# Altium PCB pcb.PcbDoc
Units mm, origin at the board's own origin, x right, y up, seen from the top; angles counter-clockwise.
Board outline 52.5 x 25 mm, 4 copper layers (Top Layer, Int1, Int2, Bottom Layer), stack 1.466 mm thick; 43 components, 32 nets, 169 pads, 164 vias.
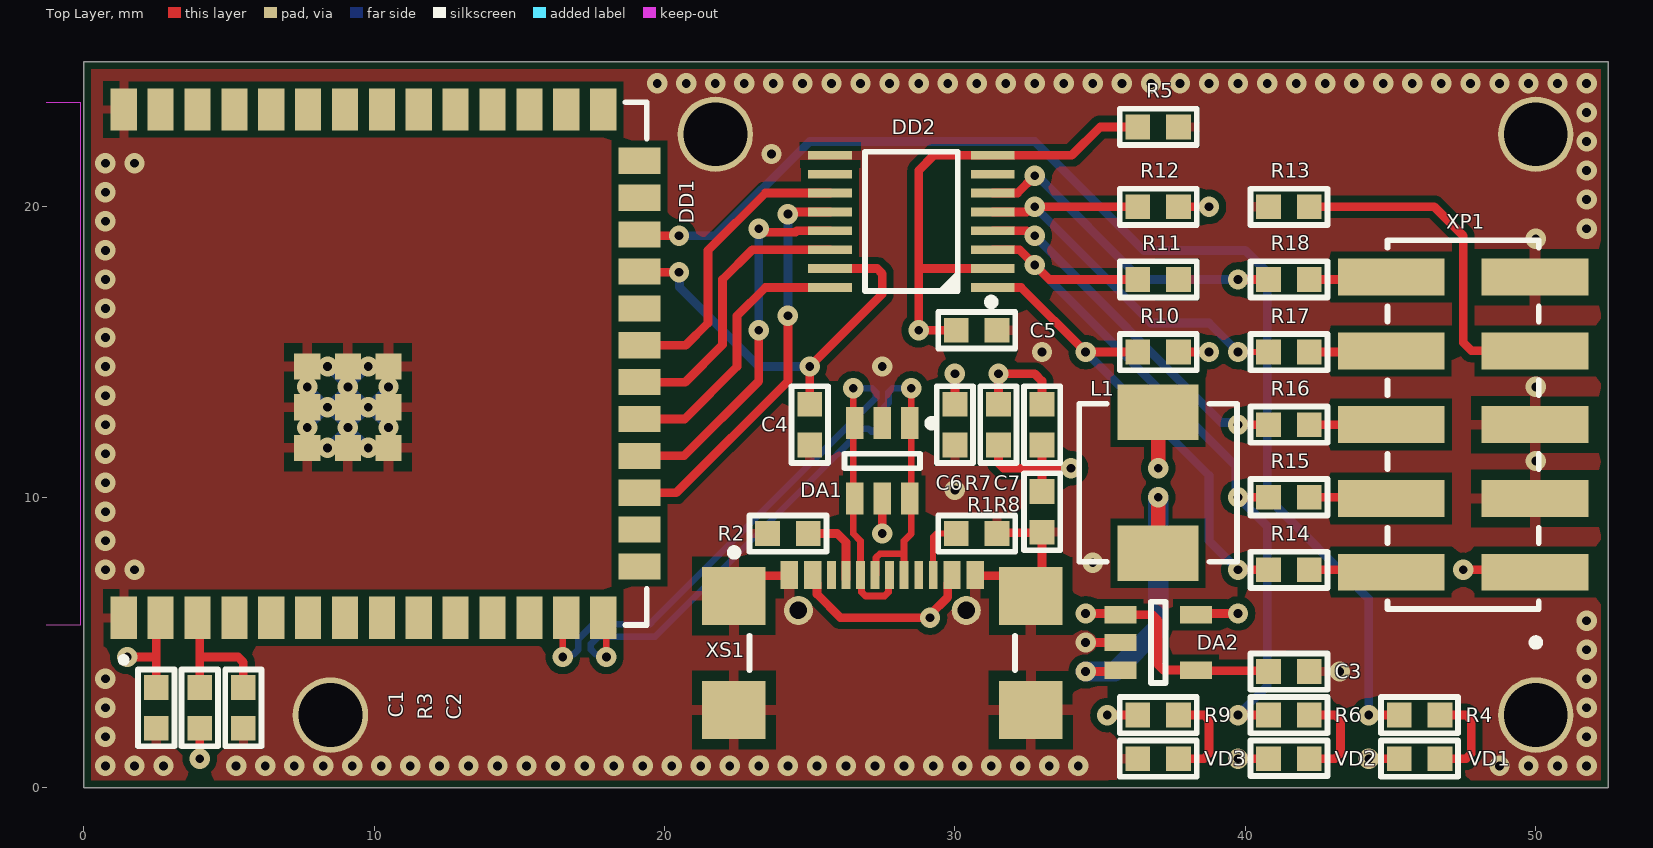
[diagram p0: Top Layer view]
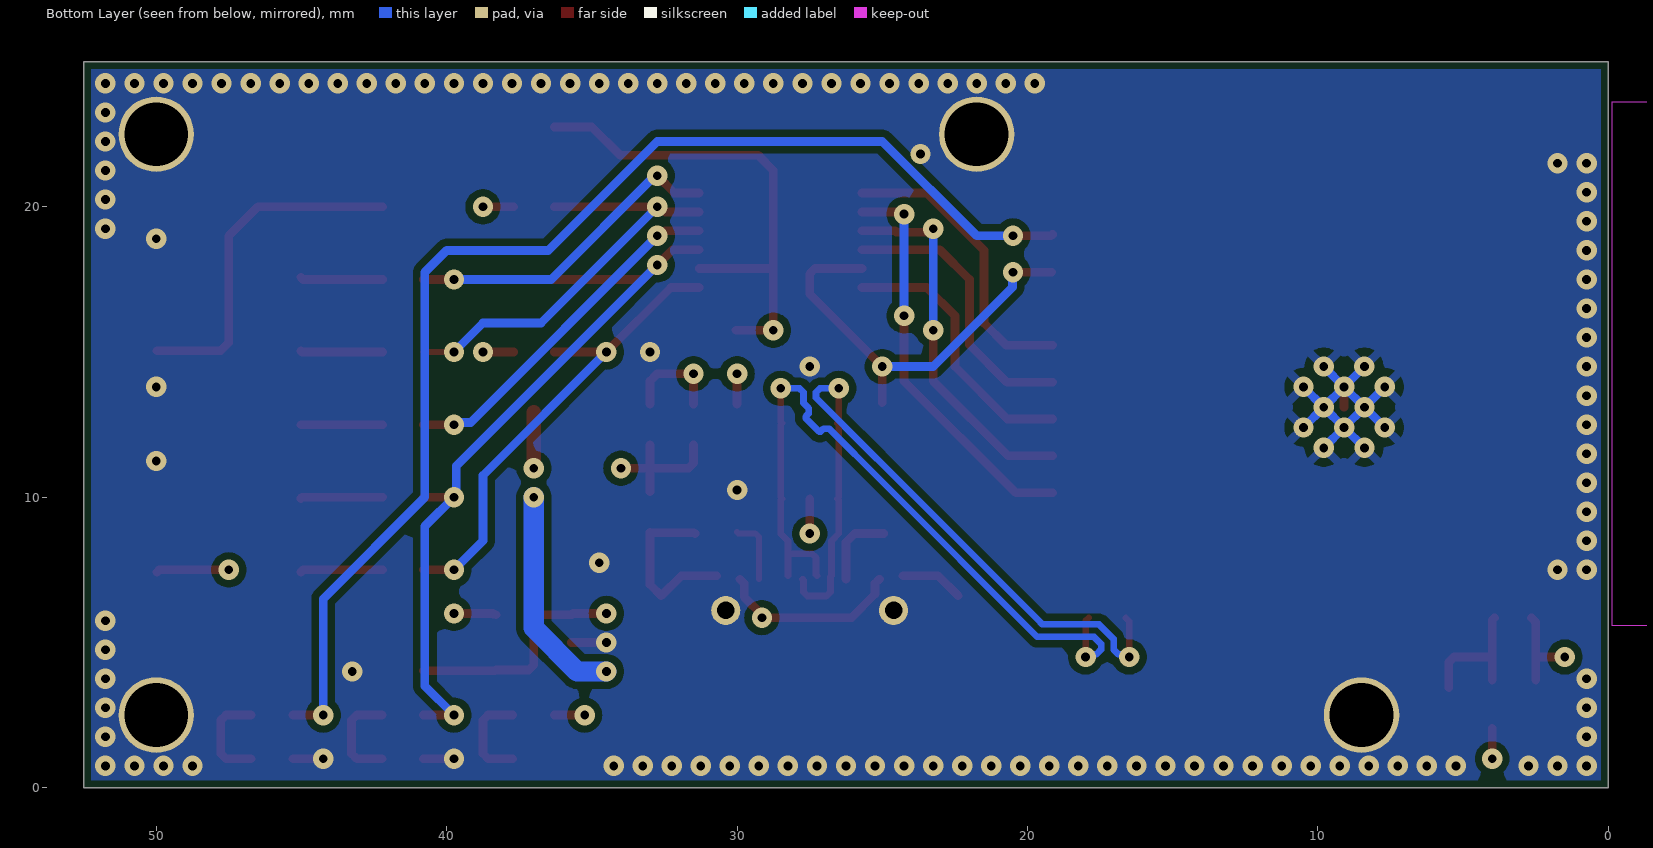
[diagram p1: Bottom Layer view, seen from below]
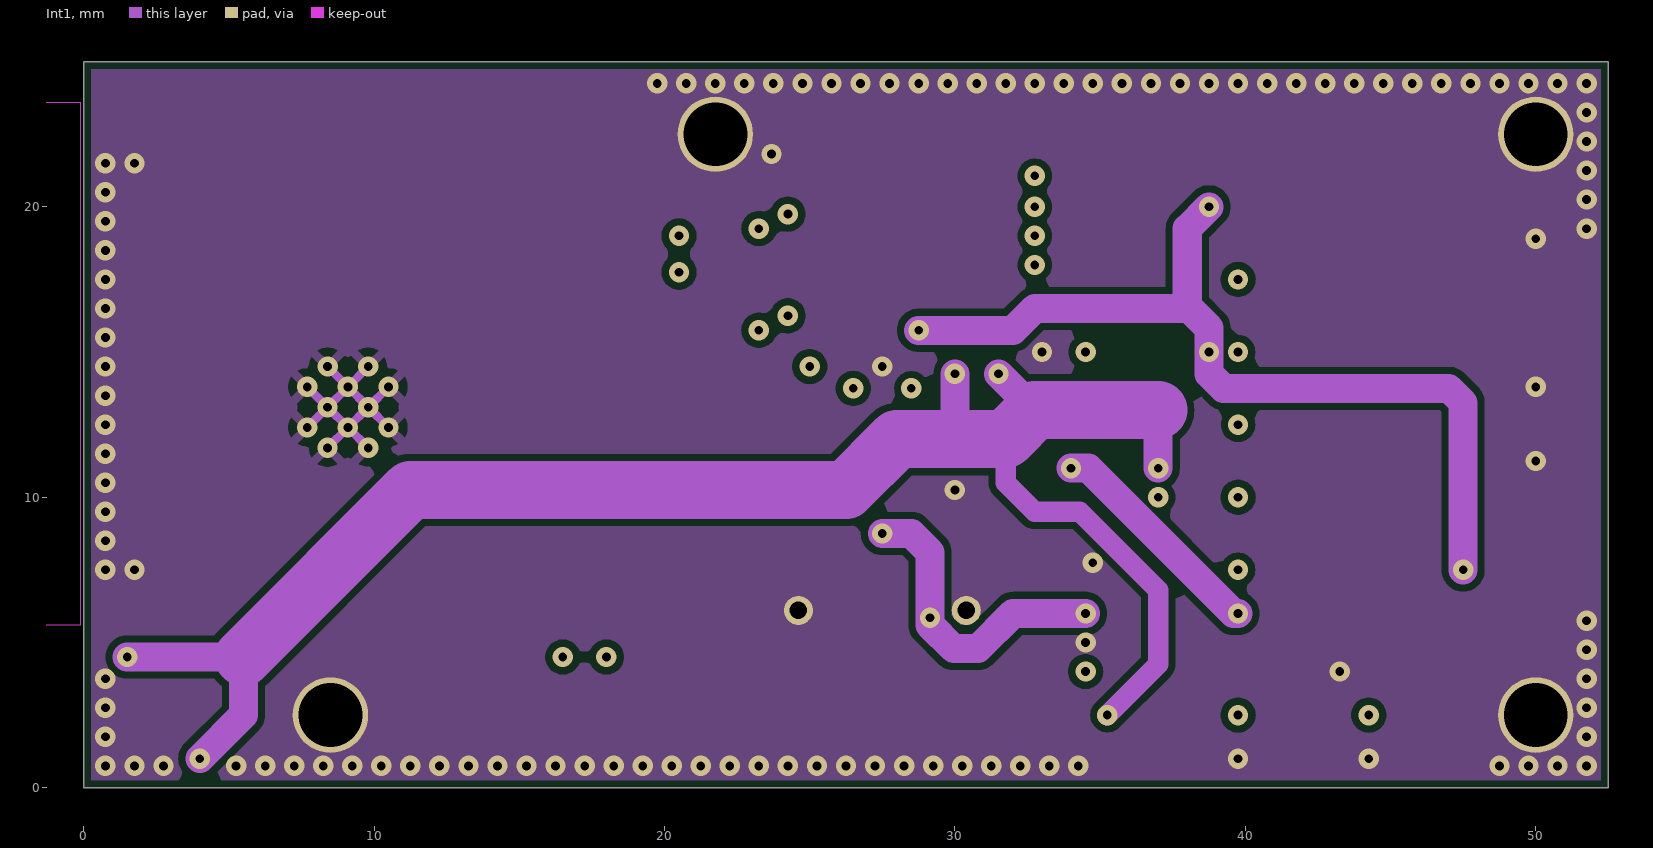
[diagram p2: Int1]
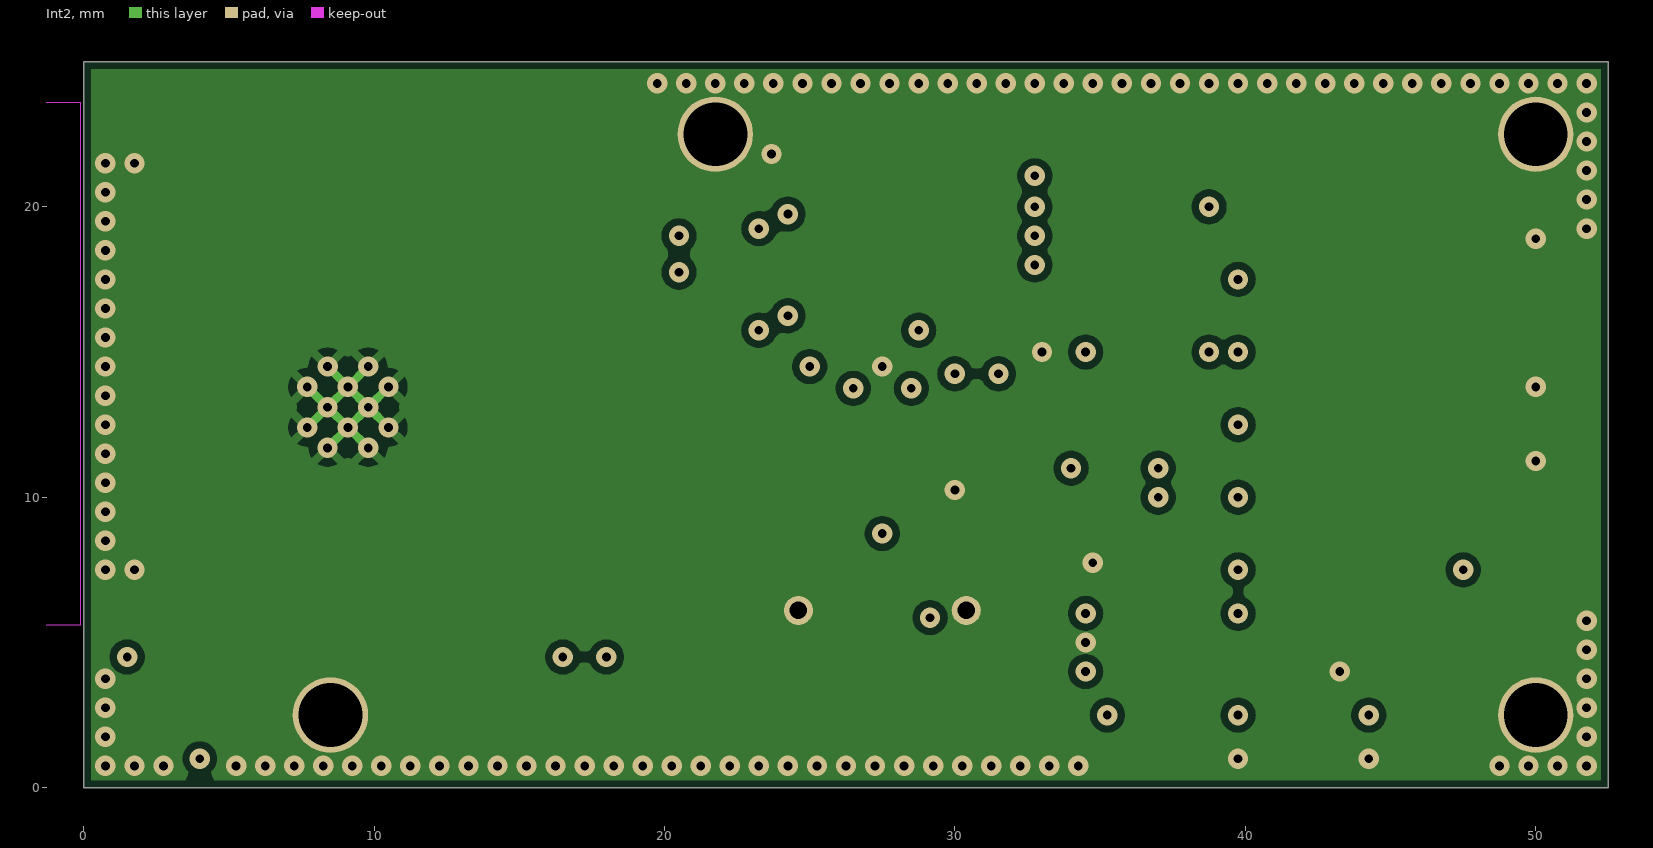
[diagram p3: Int2]

## Layer stack, top to bottom
Top Solder: solder mask 0.0254, SM-001, Dk 3.5
Top Layer: signal copper 0.018
Dielectric 2: prepreg 0.115, FR4, Dk 4.6
Int1: signal copper 0.018
Dielectric 3: core 1.164, FR4, Dk 4.6
Int2: signal copper 0.018
Dielectric 4: prepreg 0.115, FR4, Dk 4.6
Bottom Layer: signal copper 0.018
Bottom Solder: solder mask 0.0254, SM-001, Dk 3.5

## Board outline
0,0 52.5,0 52.5,25 0,25

## Design rules (kind name [scope] priority, off if disabled: settings)
AcuteAngle [All] p1: minimum=3.50000000000000E+0001 checktracksonly=FALSE
BoardOutlineClearance "BoardOutlineClearance 1" [All] p1: gap=0.25 ignorepadtopadclearanceinfootprint=FALSE except(0: Arc-SplitContinuation Track-SplitContinuation SMDPad-SplitContinuation THPad-SplitContinuation Via-SplitContinuation Fill-SplitContinuation Poly-SplitContinuation Region-SplitContinuation Text-SplitContinuation) // Milling
BoardOutlineClearance "BoardOutlineClearance 2" [All] p2: gap=0.4 ignorepadtopadclearanceinfootprint=FALSE except(0: Arc-SplitContinuation Track-SplitContinuation SMDPad-SplitContinuation THPad-SplitContinuation Via-SplitContinuation Fill-SplitContinuation Poly-SplitContinuation Region-SplitContinuation Text-SplitContinuation) // V-Cut
Clearance "Clearance 3 Oz" [All] p1 off: gap=0.35 ignorepadtopadclearanceinfootprint=FALSE except(0.25: Arc-Hole Track-Hole SMDPad-Hole THPad-Hole Via-Hole Fill-Hole Poly-Hole Region-Hole Text-Hole)
Clearance "Clearance 2 Oz" [All] p2 off: gap=0.3 ignorepadtopadclearanceinfootprint=FALSE except(0.25: Arc-Hole Track-Hole SMDPad-Hole THPad-Hole Via-Hole Fill-Hole Poly-Hole Region-Hole Text-Hole)
Clearance "Clearance-1 1 Oz" [All] p3 off: gap=0.2 ignorepadtopadclearanceinfootprint=FALSE except(0.3: Arc-Fill Arc-Poly Arc-Region Track-Fill Track-Poly Track-Region SMDPad-Fill SMDPad-Poly SMDPad-Region THPad-Fill THPad-Poly THPad-Region Via-Fill Via-Poly Via-Region Fill-Fill Fill-Poly Fill-Region Poly-Poly Poly-Region Region-Region) // Standart
Clearance "Clearance-2 1 Oz" [All] p4 off: gap=0.15 ignorepadtopadclearanceinfootprint=FALSE except(0.2: Arc-Fill Arc-Poly Track-Fill Track-Poly SMDPad-Fill SMDPad-Poly THPad-Fill THPad-Poly Via-Fill Via-Poly Fill-Fill Fill-Poly Poly-Poly; 0.25: Arc-Hole Track-Hole SMDPad-Hole THPad-Hole Via-Hole Fill-Hole Poly-Hole Region-Hole Text-Hole) // Advance
Clearance "Clearance-1 1/2 Oz" [All] p5: gap=0.125 ignorepadtopadclearanceinfootprint=FALSE except(0.2: Arc-Fill Track-Fill SMDPad-SMDPad SMDPad-Fill THPad-Fill Via-Fill Fill-Fill Poly-Region Poly-Text; 0.25: Arc-Poly Arc-Hole Track-Poly Track-Hole SMDPad-Poly SMDPad-Hole THPad-Poly THPad-Hole Via-Poly Via-Hole Fill-Poly Fill-Hole Poly-Poly Poly-Hole Region-Hole Text-Hole) // Standart
Clearance "Clearance-2 1/2 Oz" [All] p6: gap=0.1 ignorepadtopadclearanceinfootprint=FALSE except(0.15: Arc-Fill Track-Fill SMDPad-SMDPad SMDPad-Fill THPad-Fill Via-Fill Fill-Fill Poly-Region Poly-Text; 0.25: Arc-Poly Arc-Hole Track-Poly Track-Hole SMDPad-Poly SMDPad-Hole THPad-Poly THPad-Hole Via-Poly Via-Hole Fill-Poly Fill-Hole Poly-Poly Poly-Hole Region-Hole Text-Hole) // Advance
DiffPairsRouting DiffPair_DiffPairsRouting [InDifferentialPairClass('USB_D')] p1: maxlimit=0.2 minlimit=0.2 mostfreqgap=0.2 toplayer_minwidth=0.23 toplayer_maxwidth=0.23 toplayer_prefwidth=0.211 midlayer1_mingap=0 midlayer1_maxgap=0 midlayer1_prefgap=0 midlayer1_minwidth=0.045 midlayer1_maxwidth=0.045 midlayer1_prefwidth=0.045 midlayer2_mingap=0 midlayer2_maxgap=0 midlayer2_prefgap=0 midlayer2_minwidth=0.045 midlayer2_maxwidth=0.045 midlayer2_prefwidth=0.045 bottomlayer_minwidth=0.23 bottomlayer_maxwidth=0.23 bottomlayer_prefwidth=0.211 impedanceprofiledriven=TRUE impedanceprofileid={C67012E8-C93E-467A-9563-42220327DB25} impedanceprofilevalue=90.000000 maxuncoupledlength=3
DiffPairsRouting "DiffPairsRouting 1 Oz" [All] p2: maxlimit=0.254 minlimit=0.2 mostfreqgap=0.254 toplayer_minwidth=0.2 toplayer_maxwidth=0.381 toplayer_prefwidth=0.381 midlayer1_minwidth=0.2 midlayer1_maxwidth=0.381 midlayer1_prefwidth=0.381 midlayer2_minwidth=0.2 midlayer2_maxwidth=0.381 midlayer2_prefwidth=0.381 bottomlayer_minwidth=0.2 bottomlayer_maxwidth=0.381 bottomlayer_prefwidth=0.381 maxuncoupledlength=12.7
DiffPairsRouting "DiffPairsRouting 1/2 Oz" [All] p3: maxlimit=0.254 minlimit=0.1 mostfreqgap=0.254 toplayer_minwidth=0.1 toplayer_maxwidth=0.381 toplayer_prefwidth=0.381 midlayer1_minwidth=0.1 midlayer1_maxwidth=0.381 midlayer1_prefwidth=0.381 midlayer2_minwidth=0.1 midlayer2_maxwidth=0.381 midlayer2_prefwidth=0.381 bottomlayer_minwidth=0.1 bottomlayer_maxwidth=0.381 bottomlayer_prefwidth=0.381 maxuncoupledlength=12.7
HoleSize "Minimum HoleSize" [IsPad] p1 off: absolutevalues=TRUE maxlimit=5.9 minlimit=0.6 maxpercent=80.000 minpercent=20.000
HoleSize "Minimum HoleSize VIA 1" [IsVia] p2: absolutevalues=TRUE maxlimit=5.9 minlimit=0.3 maxpercent=80.000 minpercent=20.000 // Standart
HoleSize "Minimum HoleSize VIA 2" [IsVia] p3: absolutevalues=TRUE maxlimit=5.9 minlimit=0.2 maxpercent=80.000 minpercent=20.000 // Advance
HoleToHoleClearance Hole2HoleClearance [All] p1: gap=0.25 allowstackedmicrovias=FALSE
MatchedLengths DiffPair_MatchedLengths [InDifferentialPairClass('USB_D')] p1: tolerance=0.2 checknetsindiffpair=TRUE checkdiffpairvsdiffpair=FALSE checkxsignals=FALSE checkothers=FALSE
MinimumAnnularRing "Minimum AR VIA Standart" [IsVia] p1: minimumring=0.15
MinimumAnnularRing "Minimum AR PAD Standart" [IsPAD] p2: minimumring=0.2
MinimumAnnularRing "Minimum AR VIA Advance" [IsVia] p3: minimumring=0.1
MinimumAnnularRing "Minimum AR PAD Advance" [IsPAD] p4: minimumring=0.15
MinimumSolderMaskSliver "SolderMask Bridge Standart" [All] p1: minsoldermaskwidth=0.15 // All Masks
MinimumSolderMaskSliver "SolderMask Bridge Advance" [All] p2: minsoldermaskwidth=0.1 // Mask LDI
PlaneClearance "PlaneClearance 3 Oz" [All] p1: clearance=0.35
PlaneClearance "PlaneClearance 2 Oz" [All] p2: clearance=0.3
PlaneClearance "PlaneClearance 1 Oz" [All] p3: clearance=0.2
PlaneClearance "PlaneClearance-1 1/2 Oz" [All] p4: clearance=0.2 // Standart
PlaneClearance "PlaneClearance-2 1/2 Oz" [All] p5: clearance=0.15 // Advance
PlaneConnect "TermalConnect 3 Oz" [All] p1: planeconnectstyle=Relief reliefexpansion=0.2 reliefentries=4 reliefconductorwidth=0.35 reliefairgap=0.35 // Standart
PlaneConnect "TermalConnect 2 Oz" [All] p2: planeconnectstyle=Relief reliefexpansion=0.2 reliefentries=4 reliefconductorwidth=0.3 reliefairgap=0.3 // Standart
PlaneConnect "TermalConnect-1 1 Oz" [All] p3: planeconnectstyle=Relief reliefexpansion=0.2 reliefentries=4 reliefconductorwidth=0.2 reliefairgap=0.2 // Standart
PlaneConnect "TermalConnect-2 1 Oz" [All] p4: pad.planeconnectstyle=Relief pad.reliefexpansion=0.15 pad.reliefentries=4 pad.reliefconductorwidth=0.2 pad.reliefairgap=0.2 via.planeconnectstyle=Direct via.reliefexpansion=0.15 via.reliefentries=4 via.reliefconductorwidth=0.15 via.reliefairgap=0.15 // Advance
PlaneConnect "TermalConnect-1 1/2 Oz" [All] p5: planeconnectstyle=Relief reliefexpansion=0.2 reliefentries=4 reliefconductorwidth=0.2 reliefairgap=0.2 // Standart
PlaneConnect "TermalConnect-2 1/2 Oz" [All] p6: pad.planeconnectstyle=Relief pad.reliefexpansion=0.15 pad.reliefentries=4 pad.reliefconductorwidth=0.15 pad.reliefairgap=0.15 via.planeconnectstyle=Direct via.reliefexpansion=0.15 via.reliefentries=4 via.reliefconductorwidth=0.15 via.reliefairgap=0.15 // Advance
PolygonConnect "PolygonConnect 3 Oz" [All] p1: thpad.connectstyle=Relief thpad.reliefconductorwidth=0.35 thpad.reliefentries=4 thpad.polygonreliefangle="90 Angle" thpad.airgapwidth=0.35 smdpad.connectstyle=Relief smdpad.reliefconductorwidth=0.35 smdpad.reliefentries=4 smdpad.polygonreliefangle="90 Angle" smdpad.airgapwidth=0.35 via.connectstyle=Direct via.reliefconductorwidth=0.254 via.reliefentries=4 via.polygonreliefangle="90 Angle" via.airgapwidth=0.254
PolygonConnect "PolygonConnect 2 Oz" [All] p2: thpad.connectstyle=Relief thpad.reliefconductorwidth=0.3 thpad.reliefentries=4 thpad.polygonreliefangle="90 Angle" thpad.airgapwidth=0.3 smdpad.connectstyle=Relief smdpad.reliefconductorwidth=0.3 smdpad.reliefentries=4 smdpad.polygonreliefangle="90 Angle" smdpad.airgapwidth=0.3 via.connectstyle=Direct via.reliefconductorwidth=0.254 via.reliefentries=4 via.polygonreliefangle="90 Angle" via.airgapwidth=0.254
PolygonConnect "PolygonConnect-1 1 Oz" [All] p3: thpad.connectstyle=Relief thpad.reliefconductorwidth=0.2 thpad.reliefentries=4 thpad.polygonreliefangle="90 Angle" thpad.airgapwidth=0.2 smdpad.connectstyle=Relief smdpad.reliefconductorwidth=0.2 smdpad.reliefentries=4 smdpad.polygonreliefangle="90 Angle" smdpad.airgapwidth=0.2 via.connectstyle=Direct via.reliefconductorwidth=0.254 via.reliefentries=4 via.polygonreliefangle="90 Angle" via.airgapwidth=0.254 // Standart
PolygonConnect "PolygonConnect-2 1 Oz" [All] p4: thpad.connectstyle=Relief thpad.reliefconductorwidth=0.15 thpad.reliefentries=4 thpad.polygonreliefangle="90 Angle" thpad.airgapwidth=0.15 smdpad.connectstyle=Relief smdpad.reliefconductorwidth=0.15 smdpad.reliefentries=4 smdpad.polygonreliefangle="90 Angle" smdpad.airgapwidth=0.15 via.connectstyle=Direct via.reliefconductorwidth=0.254 via.reliefentries=4 via.polygonreliefangle="90 Angle" via.airgapwidth=0.254 // Advance
PolygonConnect "PolygonConnect-1 1/2 Oz" [All] p5: thpad.connectstyle=Relief thpad.reliefconductorwidth=0.15 thpad.reliefentries=4 thpad.polygonreliefangle="90 Angle" thpad.airgapwidth=0.2 smdpad.connectstyle=Relief smdpad.reliefconductorwidth=0.2 smdpad.reliefentries=4 smdpad.polygonreliefangle="90 Angle" smdpad.airgapwidth=0.2 via.connectstyle=Direct via.reliefconductorwidth=0.254 via.reliefentries=4 via.polygonreliefangle="90 Angle" via.airgapwidth=0.254 // Standart
PolygonConnect "PolygonConnect-2 1/2 Oz" [All] p6: thpad.connectstyle=Relief thpad.reliefconductorwidth=0.125 thpad.reliefentries=4 thpad.polygonreliefangle="90 Angle" thpad.airgapwidth=0.15 smdpad.connectstyle=Relief smdpad.reliefconductorwidth=0.125 smdpad.reliefentries=4 smdpad.polygonreliefangle="90 Angle" smdpad.airgapwidth=0.15 via.connectstyle=Direct via.reliefconductorwidth=0.254 via.reliefentries=4 via.polygonreliefangle="90 Angle" via.airgapwidth=0.254 // Advance
RoutingCorners [All] p1 off: cornerstyle=45-Degree minsetback=2.54 maxsetback=2.54
RoutingVias [All] p1: holewidth=0.2 width=0.4 viastyle="Through Hole" minholewidth=0.2 minwidth=0.4 maxholewidth=5.9 maxwidth=6.4
SilkToSilkClearance Silk2SilkClearance [All] p1 off: silktosilkclearance=0.15
SilkToSolderMaskClearance Silk2SolderMaskClearance [IsPad] p1 off: minsilkscreentomaskgap=0.15 clearancetoexposedcopper=TRUE
SolderMaskExpansion SolderMaskExpansion-1 [All] p1: expansion=0.05 istentingtop=FALSE // Standart
SolderMaskExpansion "SolderMaskExpansion LDI" [All] p2: expansion=0.025 istentingtop=FALSE // Advance
UnRoutedNet [All] p1: checkbadconnections=TRUE
Width "Width 3 Oz" [All] p1 off: maxlimit=10 minlimit=0.35 preferedwidth=0.4 checkconnectedcopper=TRUE
Width "Width 2 Oz" [All] p2 off: maxlimit=10 minlimit=0.3 preferedwidth=0.35 minimp=50.000000 maximp=50.000000 favimp=50.000000 checkconnectedcopper=TRUE
Width "Width 1 Oz" [All] p3: maxlimit=10 minlimit=0.15 preferedwidth=0.2 checkconnectedcopper=TRUE
Width "Width 1/2 Oz" [All] p4: maxlimit=10 minlimit=0.1 preferedwidth=0.125 checkconnectedcopper=TRUE
20 further rules are at their usual default settings.

## Classes and differential pairs
differential pair class USB_D: D
component class schematic: C1 C2 C3 C4 C5 C6 C7 DA1 DA2 DD1 DD2 L1 R1 R2 R3 R4 R5 R6 R7 R8 R9 R10 R11 R12 R13 R14 R15 R16 R17 R18 VD1 VD2 VD3 XP1 XS1
differential pair D: +NetDA1_1 -NetDA1_3

## Components (designator, comment, footprint, x,y, rotation, side; value= is the part's Value field where it differs from the comment)
C1 "04023J0R9BBWTR" "CAP: 0603" 2.5,2.75 r90 top
C2 "04023J0R9BBWTR" "CAP: 0603" 5.5,2.75 r90 top
C3 "04023J0R9BBWTR" "CAP: 0603" 41.5,4 r180 top
C4 "04023J0R9BBWTR" "CAP: 0603" 25,12.5 r90 top
C5 "04023J0R9BBWTR" "CAP: 0603" 30.75,15.75 r180 top
C6 "04023J0R9BBWTR" "CAP: 0603" 30,12.5 r90 top
C7 "04023J0R9BBWTR" "CAP: 0603" 33,12.5 r90 top
DA1 "SRV05-4.TCT" SOT23-6 27.5,11.25 r270 top
DA2 "TLV62569DBVR" SOT23-5 37,5 r0 top
DD1 "ESP32-WROOM-32U (16MB)" ? 6.64,14.6 r90 top
DD2 "TXB0106PWR" 16-SSOP 28.5,19.5 r180 top
L1 "IHLP2020CZER2R2M01" FP-IHLP-2020CZ-FP_1_905x2-MFG 37,10.5 r90 top
R1 "RC0402FR-074K7L" "RES: 0603" 30.75,8.75 r0 top
R2 "RC0402FR-074K7L" "RES: 0603" 24.25,8.75 r180 top
R3 "RC0402FR-074K7L" "RES: 0603" 4,2.75 r270 top
R4 "RC0402FR-074K7L" "RES: 0603" 46,2.5 r180 top
R5 "RC0402FR-074K7L" "RES: 0603" 37,22.75 r0 top
R6 "RC0402FR-074K7L" "RES: 0603" 41.5,2.5 r180 top
R7 "RC0402FR-074K7L" "RES: 0603" 31.5,12.5 r270 top
R8 "RC0402FR-074K7L" "RES: 0603" 33,9.5 r270 top
R9 "RC0402FR-074K7L" "RES: 0603" 37,2.5 r180 top
R10 "RC0402FR-074K7L" "RES: 0603" 37,15 r180 top
R11 "RC0402FR-074K7L" "RES: 0603" 37,17.5 r180 top
R12 "RC0402FR-074K7L" "RES: 0603" 37,20 r180 top
R13 "RC0402FR-074K7L" "RES: 0603" 41.5,20 r180 top
R14 "RC0402FR-074K7L" "RES: 0603" 41.5,7.5 r180 top
R15 "RC0402FR-074K7L" "RES: 0603" 41.5,10 r180 top
R16 "RC0402FR-074K7L" "RES: 0603" 41.5,12.5 r180 top
R17 "RC0402FR-074K7L" "RES: 0603" 41.5,15 r180 top
R18 "RC0402FR-074K7L" "RES: 0603" 41.5,17.5 r180 top
VD1 "LED, Green, *, *, *, -55...+150°C" "LED: 0603G" 46,1 r180 top
VD2 "LED, Green, *, *, *, -55...+150°C" "LED: 0603B" 41.5,1 r180 top
VD3 "LED, Green, *, *, *, -55...+150°C" "LED: 0603R" 37,1 r180 top
XP1 "TST" FP-TSM-105-01-F-DV-MFG 47.5,12.5 r270 top
XS1 "12401610E4#2A" FP-USB4110-GF-A-MFG 27.5,3.5 r0 top
ZBOAS267391354 "Comment" "BOASVIEWside:Вид платы сверху:5:0:0:0" 45,2297.5 r0 top
ZBOAS267393814 "Comment" "BOASVIEWbasic:Ocновной вид платы:5:1:0:0" 45,2360 r0 top (schematic designator fewf)
ZBOAS519188843 "Comment" "BOASVIEWrazrez:Разрез платы:50:0:0:0" 108.954,2233.734 r0 top
ZBOAS1201875177 "Слой 4" "BOASVIEWlayer:Bottom Layer:10:-1:32:5:auto" 19.865,2011.6 r0 top (schematic designator fewf)
ZBOAS1448498736 "Comment" "BOASVIEWdrill:Таблица отверстий:0:0:0:0" 345,2485 r0 top
ZBOAS3540491712 "Слой 1" "BOASVIEWlayer:Top Layer:10:1:1:2:auto" 613.865,2181.6 r0 top (schematic designator fewf)
ZBOAS5878991712 "Слой 2" BOASVIEWlayer:Int1:10:1:2:3:auto 1207.865,2181.6 r0 top (schematic designator fewf)
ZBOAS8217591712 "Слой 3" BOASVIEWlayer:Int2:10:-1:3:4:auto 1801.865,2431.6 r0 top (schematic designator fewf)

## Footprints (in the part's own frame and the unit in brackets; to place one, negate y for a bottom-side part, rotate by r counter-clockwise, add the part's x,y. Pads: shape width x height; smd on the part's side, far side on the other; paste and mask are expansions set on the pad)
16-SSOP [mm] "pitch 0.635 mm"
  rect 1.5x0.3 smd: 1(-2.8,2.275) 2(-2.8,1.625) 3(-2.8,0.975) 4(-2.8,0.325) 5(-2.8,-0.325) 6(-2.8,-0.975) 7(-2.8,-1.625) 8(-2.8,-2.275) 9(2.8,-2.275) 10(2.8,-1.625) 11(2.8,-0.975) 12(2.8,-0.325) 13(2.8,0.325) 14(2.8,0.975) 15(2.8,1.625) 16(2.8,2.275)
  rect 0.5x0.5 on Mech1: ""(-2.6,2)
  silkscreen extent -2.88,-2.4 1.6,2.9, body extent -3.13,-2.5 3.13,2.5, height 1.73
"BOASVIEWbasic:Ocновной вид платы:5:1:0:0" [mm]
"BOASVIEWdrill:Таблица отверстий:0:0:0:0" [mm]
"BOASVIEWlayer:Bottom Layer:10:-1:32:5:auto" [mm]
BOASVIEWlayer:Int1:10:1:2:3:auto [mm]
BOASVIEWlayer:Int2:10:-1:3:4:auto [mm]
"BOASVIEWlayer:Top Layer:10:1:1:2:auto" [mm]
"BOASVIEWrazrez:Разрез платы:50:0:0:0" [mm]
"BOASVIEWside:Вид платы сверху:5:0:0:0" [mm]
"CAP: 0603" [mm]
  rect 0.85x0.85 smd: 1(-0.7,0) 2(0.7,0)
  silkscreen extent -1.33,-0.63 1.33,0.63, body extent -0.8,-0.4 0.8,0.4, height 0.45
FP-IHLP-2020CZ-FP_1_905x2-MFG [mm]
  rect 1.905x2.79 smd paste+0 mask+0: 1(-2.425,0) 2(2.425,0)
  silkscreen extent -2.72,-2.72 2.72,2.72, body extent -3.48,-2.82 3.48,2.82, height 0.25
FP-TSM-105-01-F-DV-MFG [mm]
  rect 1.27x3.68 smd paste+0 mask+0: 1(5.08,2.475) 2(5.08,-2.475) 3(2.54,2.475) 4(2.54,-2.475) 5(0,2.475) 6(0,-2.475) 7(-2.54,2.475) 8(-2.54,-2.475) 9(-5.08,2.475) 10(-5.08,-2.475)
  silkscreen extent -6.35,-2.61 7.62,2.63, body extent -6.45,-4.42 6.45,4.42, height 0.25
FP-USB4110-GF-A-MFG [mm]
  rect 0.3x0.95 smd paste+0 mask+0: A8(1.25,3.825) B8(-1.75,3.825) CC1(-1.25,3.825) CC2(1.75,3.825) D+(-0.25,3.825) D+(0.75,3.825) D-(-0.75,3.825) D-(0.25,3.825)
  rect 0.6x0.95 smd paste+0 mask+0: GND(-3.2,3.825) GND(3.2,3.825) VBUS(-2.4,3.825) VBUS(2.4,3.825)
  rect 2.18x2 smd paste+0 mask+0: SHLD(-5.11,-0.825) SHLD(-5.11,3.105) SHLD(5.11,-0.825) SHLD(5.11,3.105)
  round 1 hole 0.6: ""(-2.89,2.605) ""(2.89,2.605)
  silkscreen extent -5.22,0.55 4.57,4.72, body extent -6.3,-3.92 6.3,4.36, height 0.25
"LED: 0603B" [mm]
  rect 0.85x0.85 smd: 1(-0.7,0) 2(0.7,0)
  silkscreen extent -1.33,-0.63 1.33,0.6, body extent -0.8,-0.4 0.8,0.4, height 0.6
"LED: 0603G" [mm]
  rect 0.85x0.85 smd: 1(-0.7,0) 2(0.7,0)
  silkscreen extent -1.33,-0.63 1.33,0.63, body extent -0.8,-0.4 0.8,0.4, height 0.6
"LED: 0603R" [mm]
  rect 0.85x0.85 smd: 1(-0.7,0) 2(0.7,0)
  silkscreen extent -1.33,-0.63 1.33,0.63, body extent -0.8,-0.4 0.8,0.4, height 0.6
"RES: 0603" [mm]
  rect 0.85x0.85 smd: 1(-0.7,0) 2(0.7,0)
  silkscreen extent -1.33,-0.63 1.33,0.63, body extent -0.8,-0.4 0.8,0.4, height 0.45
SOT23-5 [mm] "pitch 0.95 mm"
  rect 1.1x0.6 smd: 1(-1.3,0.95) 2(-1.3,0) 3(-1.3,-0.95) 4(1.3,-0.95) 5(1.3,0.95)
  round 0.5 on Mech1: ""(-1.1,1.1)
  silkscreen extent -0.25,-1.4 0.25,1.4, body extent -1.5,-1.5 1.5,1.5, height 1.3
SOT23-6 [mm] "pitch 0.95 mm"
  rect 1.1x0.6 smd: 1(-1.3,0.95) 2(-1.3,0) 3(-1.3,-0.95) 4(1.3,-0.95) 5(1.3,0) 6(1.3,0.95)
  round 0.5 on Mech1: ""(-1,1.1)
  silkscreen extent -1.42,-1.3 0.25,1.83, body extent -1.4,-1.45 1.4,1.45, height 1.45
? [mm]
  rect 1.45x0.9 smd: 1(-8.75,5.26) 2(-8.75,3.99) 3(-8.75,2.72) 4(-8.75,1.45) 5(-8.75,0.18) 6(-8.75,-1.09) 7(-8.75,-2.36) 8(-8.75,-3.63) 9(-8.75,-4.9) 10(-8.75,-6.17) 11(-8.75,-7.44) 12(-8.75,-8.71) 13(-8.75,-9.98) 14(-8.75,-11.25) 27(8.75,-11.25) 28(8.75,-9.98) 29(8.75,-8.71) 30(8.75,-7.44) 31(8.75,-6.17) 32(8.75,-4.9) 33(8.75,-3.63) 34(8.75,-2.36) 35(8.75,-1.09) 36(8.75,0.18) 37(8.75,1.45) 38(8.75,2.72) 39(8.75,3.99) 40(8.75,5.26)
  rect 0.9x1.45 smd: 15(-6.985,-12.5) 16(-5.715,-12.5) 17(-4.445,-12.5) 18(-3.175,-12.5) 19(-1.905,-12.5) 20(-0.635,-12.5) 21(0.635,-12.5) 22(1.905,-12.5) 23(3.175,-12.5) 24(4.445,-12.5) 25(5.715,-12.5) 26(6.985,-12.5)
  rect 0.9x0.9 smd: 41(-2.9,-2.46) 41(-2.9,-1.06) 41(-2.9,-3.86) 41(-1.5,-1.06) 41(-1.5,-3.86) 41(-1.5,-2.46) 41(-0.1,-1.06) 41(-0.1,-2.46) 41(-0.1,-3.86)
  Keep-Out Layer region: 9,6.75 -9,6.75 -9,12.75 9,12.75
  Keep-Out Layer region: 9,6.75 -9,6.75 -9,12.75 9,12.75
  silkscreen extent -10.3,-12.75 9,5.36, body extent -9,-12.75 9,12.75, height 3.25

## Part data
C1 C2 C3 C4 C5 C6 C7: library part C, Manufacturer="AVX Interconnect / Elco", Part Number=04023J0R9BBWTR
DA1: "RailClamp(R) Low Capacitance TVS Diode Array, 5 pF, 17.5 VC, -55 to 125 degC, 6-Pin SOT23, RoHS, Tape and Reel", Capacitance Value=5pF, Clamping Voltage=17.5V, Clamping Voltage (Max)=12.5V, Leakage Current=5uA, Manufacturer=Semtech, Operating Temp Range=-55Cto125C, Operating Temperature Classification=Military, Operating Temperature Max Deg. C=125C, Operating Temperature Min Deg. C=-55C, Package / Case=SOT-23, Package Description="6-Pin Small Outline Transistor, Body 2.9 x 1.6 mm, Pitch 0.95 mm", Package Reference=SOT23-6, Peak Pulse Current=12A, Peak Pulse Power Dissipation=300W, Reverse Breakdown Voltage=6V, Reverse Stand-off Voltage=5V, Test Current (It)=1mA, Configuration=Quad, Datasheet URL=https://datasheet.ciiva.com/8029/srv05-4-8029973.pdf, Datasheet Version=Jan-08, Direction Type=Uni-Directional, Leakage Current (Max)=5uA, Manufacturer URL=http://www.semtech.com/, Mounting=SurfaceMount, Mounting Style=SurfaceMount, Number of Elements=1, Packaging=TapeandReel, Pin Count=6, Polarity=Uni-Directional, Product Depth (mm)=1.6mm, Product Height (mm)=1.15mm, Product Length (mm)=2.9mm, Rad Hardened=No, Suppressor Type=DiodeArrays, Working Voltage=5V, Working Voltage (Max)=5V
DA2: library part STU_SW, "IC REG BUCK ADJ 2A SOT23-5", Case/Package=SOT-23-5, Max Input Voltage=5.5V, Max Operating Temperature=125°C, Min Input Voltage=2.5V, Min Operating Temperature=-40°C, Min Output Voltage=600mV, Output Current=2A, Switching Frequency=1.5MHz, Max Output Voltage=5.5V, Mount="Surface Mount", Output Configuration=Positive, Output Type=Adjustable, Packaging="Cut Tape", RoHS Compliant=Yes, Synchronous Rectifier=Yes
DD1: library part ESP32-S3, "RX TXRX MODULE WIFI U.FL SMD", Case/Package=SMD/SMT, Frequency=2.5GHz, Max Operating Temperature=85°C, Min Operating Temperature=-40°C, Data Rate=150Mbps, Interface=I2C, Memory Size=536KB, Mount="Surface Mount", Packaging="Tape and Reel", Sensitivity=-98dBm
DD2: Ambient Temperature Range High=85°C, Case/Package=TSSOP, High Level Output Current=-20µA, Low Level Output Current=20µA, Manufacturer Lifecycle Status=ACTIVE, Max Junction Temperature (Tj)=150°C, Max Supply Voltage=5.5V, Min Operating Temperature=-40°C, Min Supply Voltage=1.2V, Quiescent Current=3.5µA, Contact Plating=Gold, Data Rate=100Mbps, Height=1.2mm, Lead Free="Lead Free", Length=5mm, Lifecycle Status=Production, Logic Function=Translator, Max Operating Temperature=85°C, Min Supply Voltage (DC)=1.2V, Mount="Surface Mount", NexarPartId=9437508, Number of Bits=6, Number of Channels=6, Number of Circuits=1, Number of Inputs=6, Number of Outputs=6, Number of Pins=16, Number of Transceivers=6, Output Current=20µA, Packaging="Cut Tape (CT)", Propagation Delay=4ns, Radiation Hardening=No, REACH SVHC="No SVHC", RoHS=Compliant, Schedule B="8542390000, 8542390000", Termination=SMD/SMT, Thickness=1mm, Turn-On Delay Time=9.5ns, Weight=61.887009mg, Width=4.4mm
L1: library part L, "Fixed Inductors Commercial High Saturation Series 2.2uH 5.8A 29.2mΩ 20%", Case/Package=2020, Current Rating=5.8A, DC Resistance (DCR)=29.2mR, Inductance=2.2uH, Inductance Tolerance=20%, Max DC Current=10A, Max Operating Temperature=125°C, Min Operating Temperature=-55°C, Package Quantity=2000, Self Resonant Frequency=39MHz, Test Frequency=100kHz, Contact Plating=Tin, Core Material=Metal, Depth=5.43mm, Height=3mm, Height - Seated (Max)=0.118inch, Lead Free="Lead Free", Length=5.74mm, Military Standard=Not, Mount="Surface Mount", Packaging="Tape and Reel", Radiation Hardening=No, RMS Current (Irms)=5.8A, Saturation Current=10A, Shielding=Shielded, Termination=SMD/SMT, Tolerance=20%, Weight=0.007055oz, Width=0.204inch
R1 R2 R3 R4 R5 R6 R7 R8 R9 R10 R11 R12 R13 R14 R15 R16 R17 R18: library part R, Manufacturer="Yageo / Phycomp", Part Number=RC0402FR-074K7L
VD1: library part LED, "FYLS-0603UGC", Color=GREEN, ColorParameter=Green, Temperature=-55...+150°C, TypeDiode=LED, ValueManufacturerPartNumber="LED, Green, *, *, *, -55...+150°C"
VD2: library part LED, "FYLS-0603UBC", Color=GREEN, ColorParameter=Green, Temperature=-55...+150°C, TypeDiode=LED, ValueManufacturerPartNumber="LED, Green, *, *, *, -55...+150°C"
VD3: library part LED, Color=GREEN, ColorParameter=Green, Temperature=-55...+150°C, TypeDiode=LED, ValueManufacturerPartNumber="LED, Green, *, *, *, -55...+150°C"
XP1: library part TST-10
XS1: library part USB-C, "CONN RCP USB3.1 TYPEC 24P SMD RA", Connector Type=USB, Gender=Receptacle, Mount="Surface Mount", Number of Contacts=24, Number of Pins=24, Packaging="Cut Tape"

## Free pads (board coordinates)
  round 2.6 hole 2.2 mask+0.3: 1(8.5,2.5) 1(21.75,22.5) 1(50,2.5) 1(50,22.5)

## Via types
v1: diameter 0.7, hole 0.3, Top Layer to Bottom Layer, tented both sides, 163 vias
v2: diameter 0.7/0.7/0.7/0.7 (per signal layer), hole 0.3, Top Layer to Bottom Layer, tented both sides, 1 vias

## Nets (pads, with @x,y where several pads share a name; then routed paths per layer and width w, separated by ;. In a path a pad name is that pad's centre, name@x,y a point inside that pad or via, vN(x,y) a via of type N, cw(c..) or ccw(c..) an arc to the next point about the centre after c; other vN are vias at no path point)
GND: C1.1 C2.1 C3.1 C4.1 C5.1 C6.1 DA1.2 DA2.2 DD1.1 DD1.40 DD1.41 DD2.9 pad.1 R1.2 R2.2 R5.2 R8.2 R11.1 R13.2 VD1.2 VD2.2 VD3.2 XP1.3 XP1.5 XP1.9 XS1. XS1.GND XS1.SHLD | length 48
  Top Layer w0.3: DD1.41@9.1,13.1 v1(9.1,13.8) ; XS1.SHLD@22.39,6.605 23.085,7.3 XS1.GND@24.3,7.3 ; XS1.GND@30.7,7.3 31.915,7.3 32.61,6.605 33,6.995 R8.2 32.975,8.775 31.475,8.775 R1.2 ; v1(34.5,5) DA2.2 ; v1(39.75,1) VD2.2 ; v1(44.25,1) VD1.2
  Int1 w0.3: v1(7.7,12.4) v1(8.4,13.1) ; v1(7.7,13.8) v1(8.4,13.1) ; v1(8.4,11.7) v1(9.1,12.4) ; v1(8.4,14.5) v1(9.1,13.8) ; v1(9.8,11.7) v1(9.1,12.4) ; v1(9.8,14.5) v1(9.1,13.8) ; v1(10.5,12.4) v1(9.8,13.1) ; v1(10.5,13.8) v1(9.8,13.1) ; v1(8.4,13.1) v1(9.1,12.4) ; v1(8.4,13.1) v1(9.1,13.8) ; v1(9.1,12.4) v1(9.8,13.1) ; v1(9.1,13.8) v1(9.8,13.1)
  Int2 w0.3: v1(7.7,12.4) v1(8.4,13.1) ; v1(7.7,13.8) v1(8.4,13.1) ; v1(8.4,11.7) v1(9.1,12.4) ; v1(8.4,14.5) v1(9.1,13.8) ; v1(9.8,11.7) v1(9.1,12.4) ; v1(9.8,14.5) v1(9.1,13.8) ; v1(10.5,12.4) v1(9.8,13.1) ; v1(10.5,13.8) v1(9.8,13.1) ; v1(8.4,13.1) v1(9.1,13.8) ; v1(8.4,13.1) v1(9.1,12.4) ; v1(9.1,12.4) v1(9.8,13.1) ; v1(9.1,13.8) v1(9.8,13.1)
  Bottom Layer w0.3: v1(7.7,12.4) v1(8.4,13.1) ; v1(7.7,13.8) v1(8.4,13.1) ; v1(8.4,11.7) v1(9.1,12.4) ; v1(8.4,14.5) v1(9.1,13.8) ; v1(9.8,11.7) v1(9.1,12.4) ; v1(9.8,14.5) v1(9.1,13.8) ; v1(10.5,12.4) v1(9.8,13.1) ; v1(10.5,13.8) v1(9.8,13.1) ; v1(8.4,13.1) v1(9.1,12.4) ; v1(8.4,13.1) v1(9.1,13.8) ; v1(9.1,12.4) v1(9.8,13.1) ; v1(9.1,13.8) v1(9.8,13.1)
  other v1: 0.75,0.75 1.75,0.75 2.75,0.75 5.25,0.75 6.25,0.75 7.25,0.75 8.25,0.75 9.25,0.75 10.25,0.75 11.25,0.75 12.25,0.75 13.25,0.75 14.25,0.75 15.25,0.75 16.25,0.75 17.25,0.75 18.25,0.75 19.25,0.75 20.25,0.75 21.25,0.75 22.25,0.75 23.25,0.75 24.25,0.75 25.25,0.75 26.25,0.75 27.25,0.75 28.25,0.75 29.25,0.75 30.25,0.75 31.25,0.75 32.25,0.75 33.25,0.75 34.25,0.75 48.75,0.75 49.75,0.75 50.75,0.75 51.75,0.75 0.75,1.75 51.75,1.75 0.75,2.75 51.75,2.75 0.75,3.75 51.75,3.75 43.25,4 51.75,4.75 51.75,5.75 0.75,7.5 1.75,7.5 34.746,7.746 0.75,8.5 0.75,9.5 30,10.25 0.75,10.5 50,11.25 0.75,11.5 0.75,12.5 0.75,13.5 50,13.8 0.75,14.5 27.5,14.5 33,15 0.75,15.5 0.75,16.5 0.75,17.5 0.75,18.5 50,18.9 51.75,19.25 0.75,19.5 51.75,20.25 0.75,20.5 51.75,21.25 0.75,21.5 1.75,21.5 23.683,21.817 51.75,22.25 51.75,23.25 19.75,24.25 20.75,24.25 21.75,24.25 22.75,24.25 23.75,24.25 24.75,24.25 25.75,24.25 26.75,24.25 27.75,24.25 28.75,24.25 29.75,24.25 30.75,24.25 31.75,24.25 32.75,24.25 33.75,24.25 34.75,24.25 35.75,24.25 36.75,24.25 37.75,24.25 38.75,24.25 39.75,24.25 40.75,24.25 41.75,24.25 42.75,24.25 43.75,24.25 44.75,24.25 45.75,24.25 46.75,24.25 47.75,24.25 48.75,24.25 49.75,24.25 50.75,24.25 51.75,24.25
NetC2_2: C2.2 DD1.3 R3.1 | length 4.6
  Top Layer w0.3: DD1.3 4,5.77 4,4.5 ; R3.1@4,3.7 4,4.5 ; C2.2 5.5,4.324 5.324,4.5 4,4.5
NetC3_2: C3.2 DA1.5 DA2.1 DA2.4 XS1.VBUS | length 26.3
  Top Layer w0.3: XS1.VBUS@25.1,7.18 25.25,7.03 25.25,6.668 26.063,5.855 v1(29.145,5.855) 29.145,5.956 29.75,6.561 29.75,7.03 XS1.VBUS@29.9,7.18 ; v1(27.5,8.75) DA1.5 ; v1(34.5,6) 35.65,6 DA2.1 36.8,5.95 37,5.75 37,4.226 37.176,4.05 DA2.4 38.325,4.025 C3.2@40.8,4.025
  Int1 w1: v1(27.5,8.75) 28.5,8.75 29.145,8.105 v1(29.145,5.855) 29.145,5.605 29.961,4.789 30.789,4.789 32,6 v1(34.5,6)
NetC4_2: C4.2 DD1.23 DD2.15 | length 14.9
  Top Layer w0.2: DD1.23 DD1.23@19.165,17.75
  Top Layer w0.3: DD1.23@19.165,17.75 v1(20.5,17.75) ; C4.2@25,13.259 v1(25,14.5) 27.5,17 27.5,17.699 27.324,17.875 DD2.15
  Bottom Layer w0.3: v1(20.5,17.75) 20.516,17.734 20.516,17.234 23.25,14.5 v1(25,14.5)
NetC5_2: C5.2 DD2.2 DD2.8 R5.1 R10.1 R12.1 XP1.1 | length 52.9
  Top Layer w0.3: C5.2 v1(28.75,15.75) 28.75,17.875 ; DD2.2 28.75,17.875 ; R5.1 35,22.75 34.025,21.775 DD2.8 29.275,21.775 28.75,21.25 28.75,17.875 ; R10.1 v1(38.75,15) ; R12.1 v1(38.75,20) ; v1(47.5,7.5) 49.895,7.5 XP1.1
  Int1 w1: v1(28.75,15.75) 32,15.75 32.75,16.5 38.078,16.5 38.75,15.828 38.75,14.25 39.25,13.75 47,13.75 47.5,13.25 v1(47.5,7.5) ; 38,16.578 38,19.25 v1(38.75,20)
NetC7_1: C7.1 DA2.5 R7.2 R8.1 | length 14
  Top Layer w0.3: R7.2 31.5,11.176 31.676,11 33,11 ; R8.1 33,11 ; C7.1 33,11 ; v1(34,11) 33,11 ; DA2.5 DA2.5@38.325,5.975 ; DA2.5@38.4,5.975 38.425,6 v1(39.75,6)
  Int1 w1: v1(34,11) 34.6,11 39.6,6 v1(39.75,6)
NetDA1_1: DA1.1 DA1.6 DD1.14 XS1.D+ | length 25.8
  Top Layer w0.23: DD1.14 18,5.74 v1(18,4.5) ; XS1.D+@27.25,7.3 27.285,7.335 27.285,7.92 27.42,8.055 28.25,8.055 ; XS1.D+@28.25,7.3 28.25,8.055 ; v1(28.5,13.75) 28.5,12.6 DA1.1 28.5,12.5 28.5,10 DA1.6 28.5,9.9 28.5,8.75 28.25,8.5 28.25,8.055
  Bottom Layer w0.23: v1(18,4.5) 17.91,4.59 17.632,4.59 17.465,4.757 17.465,4.947 17.712,5.195 19.663,5.195 25,10.532 25.622,11.154 26.234,11.766 26.831,12.363 27.022,12.363 27.123,12.262 27.175,12.262 27.639,12.726 27.639,12.778 27.538,12.879 27.538,13.07 27.715,13.247 27.715,13.615 27.85,13.75 v1(28.5,13.75)
NetDA1_3: DA1.3 DA1.4 DD1.13 XS1.D- | length 25.8
  Top Layer w0.23: v1(16.5,4.5) 16.5,5.73 DD1.13 ; v1(26.5,13.75) 26.5,12.6 DA1.3 26.5,12.5 26.5,10 DA1.4 26.5,9.9 26.5,8.75 26.75,8.5 XS1.D-@26.75,7.325 ; XS1.D-@26.75,7.3 26.785,7.265 26.785,6.735 26.92,6.6 27.58,6.6 27.715,6.735 27.715,7.145 XS1.D-@27.75,7.18
  Bottom Layer w0.23: v1(16.5,4.5) 16.59,4.59 16.868,4.59 17.035,4.757 17.035,5.125 17.534,5.625 19.233,5.625 19.485,5.625 19.663,5.803 25,11.14 25.318,11.458 27.285,13.425 27.285,13.615 27.15,13.75 v1(26.5,13.75)
NetDA2_3: DA2.3 L1.1 | length 10.8
  Top Layer w0.3: v1(34.5,4) 35.65,4 DA2.3
  Top Layer w0.5: L1.1 v1(37,10)
  Bottom Layer w0.7: v1(34.5,4) 35.5,4 37,5.5 v1(37,10)
NetDD1_17: DD1.17 DD2.12 | length 13.9
  Top Layer w0.3: DD1.17 20.405,10.155 24.25,14 v1(24.25,16.25) ; v1(24.25,19.75) 24.325,19.825 DD2.12
  Bottom Layer w0.3: v1(24.25,16.25) v1(24.25,19.75)
NetDD1_18: DD1.18 DD2.13 | length 12.9
  Top Layer w0.3: DD1.18 20.675,11.425 23.25,14 v1(23.25,15.75) ; v1(23.25,19.25) 23.358,19.25 23.483,19.125 24.509,19.125 24.559,19.175 DD2.13
  Bottom Layer w0.3: v1(23.25,15.75) v1(23.25,19.25)
NetDD1_19: DD1.19 DD2.16 | length 9.5
  Top Layer w0.3: DD1.19 20.695,12.695 22.5,14.5 22.5,16.25 23.475,17.225 DD2.16
NetDD1_20: DD1.20 DD2.14 | length 9.8
  Top Layer w0.3: DD1.20 20.715,13.965 22,15.25 22,17.5 23.025,18.525 DD2.14
NetDD1_21: DD1.21 DD2.11 | length 10.2
  Top Layer w0.3: DD1.21 20.735,15.235 21.5,16 21.5,18.5 23.475,20.475 DD2.11
NetDD1_24: DD1.24 R4.2 | length 42.6
  Top Layer w0.3: DD1.24 19.185,19 v1(20.5,19) ; v1(44.25,2.5) R4.2
  Bottom Layer w0.3: v1(20.5,19) 21.75,19 25,22.25 32.75,22.25 36.5,18.5 40,18.5 40.75,17.75 40.75,10 44.25,6.5 v1(44.25,2.5)
NetDD2_1: DD2.1 R10.2 R14.2 | length 16.6
  Top Layer w0.3: DD2.1 32.275,17.225 v1(34.5,15) R10.2 ; v1(39.75,7.5) R14.2
  Bottom Layer w0.3: v1(34.5,15) 38.75,10.75 38.75,8.5 v1(39.75,7.5)
NetDD2_3: DD2.3 R6.2 R11.2 R15.2 | length 26.8
  Top Layer w0.3: DD2.3 32.225,18.525 33.25,17.5 R11.2 ; v1(39.75,2.5) R6.2 ; v2(39.75,10) R15.2
  Bottom Layer w0.3: v1(32.75,18) 39.673,11.076 39.673,10.077 40.75,9 40.75,3.5 v1(39.75,2.5)
NetDD2_4: DD2.4 R16.2 | length 12.3
  Top Layer w0.3: DD2.4 32.467,19.175 32.642,19 v1(32.75,19) ; v1(39.75,12.5) R16.2
  Bottom Layer w0.3: v1(32.75,19) 39.173,12.577 39.673,12.577 v1(39.75,12.5)
NetDD2_5: DD2.5 R12.2 R17.2 | length 15.3
  Top Layer w0.2: v1(39.75,15) R17.2
  Top Layer w0.3: DD2.5 32.467,19.825 32.642,20 R12.2
  Bottom Layer w0.3: v1@32.625,19.875 32.875,19.875 36.75,16 38.75,16 v1(39.75,15)
  other v1: 32.75,20
NetDD2_6: DD2.6 R18.2 | length 11.2
  Top Layer w0.3: DD2.6 32.158,20.475 v1(32.75,21.067) ; v1(39.75,17.5) R18.2
  Bottom Layer w0.3: v1(32.75,21.067) 32.836,21.067 36.403,17.5 v1(39.75,17.5)
NetR1_1: R1.1 XS1.CC2 | length 2.3
  Top Layer w0.2: XS1.CC2@29.25,7.18 29.25,8.64 29.367,8.757 29.957,8.757 R1.1@30,8.8
NetR2_1: R2.1 XS1.CC1 | length 2.7
  Top Layer w0.3: R2.1 25.949,8.75 26.25,8.449 XS1.CC1@26.25,7.18
NetR4_1: R4.1 VD1.1 | length 3.4
  Top Layer w0.3: VD1.1@46.725,1 47.599,1 47.775,1.176 47.775,2.324 47.599,2.5 R4.1@46.725,2.5
NetR6_1: R6.1 VD2.1 | length 3.4
  Top Layer w0.3: VD2.1@42.225,1 43.099,1 43.275,1.176 43.275,2.324 43.099,2.5 R6.1@42.225,2.5
NetR9_1: R9.1 VD3.1 | length 3.3
  Top Layer w0.3: VD3.1@37.725,1 38.574,1 38.75,1.176 38.75,2.324 38.574,2.5 R9.1@37.725,2.5
NetR13_1: R13.1 XP1.7 | length 12
  Top Layer w0.3: R13.1 46.5,20 47.5,19 47.5,15.33 47.79,15.04 XP1.7
NetR14_1: R14.1 XP1.2 | length 2.9
  Top Layer w0.3: R14.1 44.945,7.5 XP1.2
NetR15_1: R15.1 XP1.4 | length 2.8
  Top Layer w0.3: R15.1 44.985,10 XP1.4
NetR16_1: R16.1 XP1.6 | length 2.8
  Top Layer w0.3: R16.1 XP1.6
NetR17_1: R17.1 XP1.8 | length 2.8
  Top Layer w0.3: R17.1 44.985,15 XP1.8
NetR18_1: R18.1 XP1.10 | length 2.9
  Top Layer w0.3: R18.1 44.945,17.5 XP1.10
VDD: C1.2 C6.2 C7.2 DD1.2 L1.2 R3.2 R7.1 R9.2 | length 74.2
  Top Layer w0.3: v1(1.5,4.5) 2.5,4.5 ; C1.2@2.5,3.7 2.5,4.5 ; DD1.2 2.5,5.7 2.5,4.5 ; v1(4,1) R3.2 ; C6.2 v1(30,14.25) ; R7.1 v1(31.5,14.25) 32.75,14.25 33,14 C7.2 ; v1(35.25,2.5) R9.2
  Top Layer w0.5: v1(37,11) L1.2
  Int1 w0.7: 31.75,12 31.75,10.5 32.75,9.5 34.3,9.5 37,6.8 37,4.25 v1(35.25,2.5)
  Int1 w1: v1(1.5,4.5) 5.5,4.5 5.5,2.5 v1(4,1) ; 30,12 v1(30,14.25) ; v1(31.5,14.25) 32.75,13 ; v1(37,11) 37,13
  Int1 w2: 5.5,4.5 11.25,10.25 25,10.25 26.25,10.25 28,12 30,12 31.75,12 32.75,13 37,13
pads on no net: DA1. DA2. DD1.4 DD1.5 DD1.6 DD1.7 DD1.8 DD1.9 DD1.10 DD1.11 DD1.12 DD1.15 DD1.16 DD1.22 DD1.25 DD1.26 DD1.27 DD1.28 DD1.29 DD1.30 DD1.31 DD1.32 DD1.33 DD1.34 DD1.35 DD1.36 DD1.37 DD1.38 DD1.39 DD2. DD2.7 DD2.10 XS1.A8 XS1.B8

## Polygon pours and split planes (outlines as drawn)
GND on Top Layer "GND_L01_P001" (solid, remove dead copper, pour order 1): 0,0 0,25 52.5,25 52.5,0
GND on Int2 "GND_L03_P002" (solid, remove dead copper, pour order 2): 0,0 0,25 52.5,25 52.5,0
GND on Bottom Layer "GND_L04_P005" (solid, remove dead copper, pour order 5): 0,0 0,25 52.5,25 52.5,0
GND on Int1 "GND_L02_P004" (solid, remove dead copper, pour order 4): 0,0 0,25 52.5,25 52.5,0

## Other copper
Top Layer:
  pour cut-out: 35.25,2.5 35.25,3.75 36.49,3.75 36.5,3.74 36.5,2.5

## Silkscreen, mask and mechanical layers (free items; w line width, h text height)
Mechanical 7:
  text "BOASFORMAT|А2|1|0|834645670|233858267|1000000000|5:1|" at -22.9,2517.1 h0
  text "BOASFORMAT|А2|2|233858267|834645670|467716534|1000000000|10:1|Top Layer" at 571.1,2517.1 h0
  text "BOASFORMAT|А2|3|467716534|834645670|701574801|1000000000|10:1|Int1" at 1165.1,2517.1 h0
  text "BOASFORMAT|А2|4|701574801|834645670|935433068|1000000000|10:1|Int2" at 1759.1,2517.1 h0
  text "DimV|0|-2952756|26732283|916496063|-3937007|-1968504|5||*||h12|False|False|False|False|2" at 45,2305 h0
  text "DimRoughness|0|0|-60196850|-916496063|1|||||0|0|False|2" at 130,2305 h0
  text "DimRoughness|0|0|-60196850|-909606299|1|||||0|0|False|2" at 130,2297.5 h0 r180
  text "DimLitera|75944882|886377953|22086614|7116142|1|||2||0|0|False" at 88.9,2210.425 h0
  text "DimLitera|45826772|896515748|20078741|-18996063|1|||||0|0|False" at 88.9,2210.4 h0
  text "DimLitera|71220472|874271654|9744094|-2559055|1|||1||0|0|False" at 108.25,2204.25 h0
  text "DimLitera|96811024|887755905|-12696850|12007874|1|||3||0|0|False" at 277.75,2201.5 h0
  text "DimLitera|90511811|885196850|-18996063|9448819|1|||3||0|0|False" at 277.75,2201.5 h0
  text "DimLitera|90314961|861870079|-19192913|-13877952|1|||3||0|0|False" at 277.75,2201.5 h0
  text "DimLitera|95334646|859212598|-14173228|-16535433|1|||3||0|0|False" at 277.75,2201.5 h0
  text "1. На главном виде проводящий рисунок условно не показан. / 2. Общие допуски формы и расположения по ГОСТ 30893.2-2002 - класс точности H. / 3. Шаг координатной сетки 0,25мм по ГОСТ Р 51040-97. / 4. Плату изготовить методом металлизации сквозных отверстий. / 5. Класс точности платы по ГОСТ Р 53429-2009 - 4. / 6. Параметры отверстий платы приведены в таблице 1. / 7. Плата должна соответствовать ГОСТ 23752-79, группа жесткости - 1. / 8. Остальные технические требования по ОСТ 4 ГО.070.014-75. / 9. Данные о конфигурации, проводящем рисунке, расположении и размерах отверстий, паяльной маске и маркировке содержатся в ИУ4.11.03.21.83.13.002 М-УЛ." at 381.1,2159.2 h10.75
  text "BOASFORMAT|А2|5|0|669291340|233858267|834645670|10:1|Bottom Layer" at -22.9,2097.1 h0
  text "DimV|0|-49212598|271811024|814133858|-6889764|-29527559|5||||h12|True|False|False|False|2" at 667.5,2045 h0
  text "DimV|0|-39370078|370236220|809212598|-102362204|-18700787|5||||js12|True|False|False|False|2" at 917.5,2032.5 h0
  text "DimH|-81692913|-39370078|370236220|809212598|-11811023|-48228346|5||||js12|True|False|False|False|2" at 917.5,2032.5 h0
  text "DimH|-55610235|0|370236220|809212601|-13779527|8858265|5||||js12|True|False|False|False|2" at 917.5,2032.5 h0
  text "DimV|0|-4921260|271811024|769842520|-3937008|-2952756|5||||js12|True|False|False|False|2" at 667.5,1932.5 h0
  text "DimH|-98425196|-4921260|370236220|769842520|-40354330|-11811024|5||||js12|True|False|False|False|2" at 917.5,1932.5 h0
  text "DimH|-103346456|0|375157480|764921260|-48228346|-9842520|5||||h12|True|False|False|False|2" at 930,1920 h0
  text "SET2|Superlayer=MechanicalLayer7|Wsuperlayer=MechanicalLayer8|Layergrid=MechanicalLayer9|Werase=MechanicalLayer11|Layermark=MechanicalLayer12|Layerstamp=MechanicalLayer13|Gridline=0,15|Boardline=0,5|Contourpolygonline=0,3|PcbGridStep=0,25|PcbGridNumbering=True|PcbGridCleareanceAtView=0|PcbGridNumberEach=l4|PcbGridLineEach=l1|PcbGridCountSecondaryStrip=3|PcbGridEnabledStrip=True|PcbGridHorizontal90=False|PcbGridWhiteAreaBeforeText=False|PcbSignalGridEnabled=True|PcbSignalShowBukva=True|RealSignalLayerNames=False|PcbGridTextsEnabledBothSide=l2|PcbGridEnabledBothSide=l4|PcbPolarGridEnabled=False|PcbPolarGridAngleStep=10|PcbPolarGridRadialStep=10|PcbPolarGridCenterPcbGrid=False|SilkShowPad=True|SilkViewName=Слой маркировки|SilkShowHole=True|SilkShowAxis=True|SilkShowBukva=True|SilkShowGrid=True|SolderShowGrid=True|SolderViewName=Слой маски|SolderShowAxis=True|SolderShowBukva=True|MainViewShowGrid=False|MainViewMinDiameterHoles=2|MainViewUseShapesDrill=True|ShowBukvaOnSboky=False|ShowBukvaViews=True|Density=2,2|CustomHoleSizeFactor=100|PcbDoubleLineHeader=False|PcbAccuracy=a4|TableName=Таблица 1|RazrezWidth=150|RealLayerNames=False|RazrezShowBukva=True|RazrezBukva=В-В|Sher=Ra 25|Asstoplayer=MechanicalLayer1|Asstoplayer2=None|Assbottomlayer=MechanicalLayer2|Assbottomlayer2=None|AssMinDiameterHoles=2|AssDim=False|AssMech=False|AssSilk=False|AssComponentSilk=False|AssFreeSilk=False|AssSmdPads=False|AssGridEnable=False|AssShowBukva=True|Mirror=Horisontal|PcbGridFontSize=5|PcbGridCenterZero=False|TTStampDistance=12|MainFontSize=5|PolyShtrihEnable=True|RegionShtrihEnable=True|PolyStep=5|PcbDrillDrawingGridEnabled=False|PcbDrillDrawingViewName=Слой сверловки|PcbDrillDrawingShowBukva=False|PcbDrillDrawingShowAxis=True|PcbSignalLayersUseDrill=True|PcbSignalLayersUseWhiteHoles=True|PcbSignalLayersUseShapesDrill=True|PcbSignalLayersShowAxis=True|Thinline=0,15|Basicline=0,5" at -22.9,-22.875 h0
  text "DimLitera|103405512|877224409|103405512|877224409|1|||3||0|0|False" at -22.9,-22.9 h0
  text "STAMP|Первичная применяемость|ИУ4.11.03.03.21.83.13.002" at -22.9,-22.9 h0
  text "STAMP|Обозначение|ИУ4.11.03.03.21.83.13.002 СБ" at -22.9,-22.9 h0
  text "STAMP|Проверил|Леонидов В. С." at -22.9,-22.9 h0
  text "STAMP|Разработал|Круглов В. С." at -22.9,-22.9 h0
  text "STAMP|Наименование1|Плата печатная многослойная" at -22.9,-22.9 h0
  text "BOASVIADRILLTABLE:circle1001,118110,164,ГОСТ 53429 б/опл" at -22.9,-22.9 h0
  text "2BOASDRILLTABLE:circle1100,236220,Да,2,True,ГОСТ 53429 б/опл|circle0101,866142,Да,4,True,ГОСТ 53429 б/опл" at -22.9,-22.9 h0
Mechanical 8:
  drawing of 37 lines, arcs and shapes, not listed
Mechanical 9:
  circle w0.15: c130,2294.17 r1.67
  circle w0.15: c130,2308.33 r1.67
  circle w0.5: c245.5,2232 r0.2
  circle w0.5: c229.5,2225.5 r0.2
  circle w0.5: c229,2166.25 r0.2
  circle w0.5: c241.75,2159.5 r0.2
  circle w0.5: c145,2228.5 r0.2
  circle w0.5: c133,2197.75 r0.2
  circle w0.5: c139.9,2162.15 r0.2
  circle w0.5: c140.093,2159.15 r0.2
  region: 35,2297.5 35.658,2292.5 35,2293 34.342,2292.5
  region: 35,2305 34.342,2310 35,2309.5 35.658,2310
  region: 236.6,2284.525 229.1,2283.537 229.85,2284.525 229.1,2285.512
  region: 236.4,2319.675 228.9,2318.688 229.65,2319.675 228.9,2320.663
  region: 27.5,2360 26.842,2365 27.5,2364.5 28.158,2365
  region: 27.5,2485 28.158,2480 27.5,2480.5 26.842,2480
  region: 35,2372.5 35.658,2367.5 35,2368 34.342,2367.5
  region: 35,2360 34.342,2365 35,2364.5 35.658,2365
  region: 35,2472.5 35.658,2467.5 35,2468 34.342,2467.5
  region: 35,2372.5 34.342,2377.5 35,2377 35.658,2377.5
  region: 307.5,2335 302.5,2334.342 303,2335 302.5,2335.658
  region: 45,2335 50,2335.658 49.5,2335 50,2334.342
  region: 295,2342.5 290,2341.842 290.5,2342.5 290,2343.158
  region: 45,2342.5 50,2343.158 49.5,2342.5 50,2341.842
  region: 295,2350 290,2349.342 290.5,2350 290,2350.658
  region: 87.5,2350 92.5,2350.658 92,2350 92.5,2349.342
  region: 295,2495 290,2494.342 290.5,2495 290,2495.658
  region: 153.75,2495 158.75,2495.658 158.25,2495 158.75,2494.342
  lines w0.15: 26.5,2360 45,2360 ; 26.5,2485 45,2485 ; 27.5,2360 27.5,2485 ; 34,2297.5 45,2297.5 ; 34,2305 45,2305 ; 34,2360 45,2360 ; 34,2472.5 295,2472.5 ; 35,2280.599 35,2313 ; 35,2337.585 35,2372.5 35,2472.5 ; 45,2334 45,2360 ; 45,2335 307.5,2335 ; 45,2341.5 45,2360 ; 45,2342.5 295,2342.5 ; 45,2372.5 34,2372.5 295,2372.5 295,2341.5 ; 81.531,2210.425 88.9,2210.425 145,2228.5 ; 83.9,2210.4 88.9,2210.4 139.9,2162.15 ; 87.5,2349 87.5,2372.5 ; 87.5,2350 295,2350 ; 101.951,2204.25 108.25,2204.25 133,2197.75 ; 125.09,2289 130,2297.5 132.89,2292.5 ; 127.11,2310 130,2305 134.91,2313.5 ; 153.75,2472.5 153.75,2496 ; 153.75,2495 295,2495 ; 220.4,2319.675 236.4,2319.675 ; 220.6,2284.525 236.6,2284.525 ; 229,2166.25 277.75,2201.5 ; 229.5,2225.5 277.75,2201.5 ; 241.75,2159.5 277.75,2201.5 ; 245.5,2232 277.75,2201.5 ; 295,2349 295,2472.5 ; 295,2496 295,2472.5 ; 307.5,2334 307.5,2360 ; 262.25,2205.25 262.25,2205.25 ; 262.25,2205.25 262.25,2205.25 ; 277.75,2201.5 285.119,2201.5 ; 277.75,2201.5 285.119,2201.5 ; 277.75,2201.5 285.119,2201.5 ; 277.75,2201.5 285.119,2201.5
  lines w2: 239.1,2279.525 239.1,2292.025 ; 239.1,2309.525 239.1,2322.025
  text "28,25js12" at 215.812,2497.53 h7.68
  text "25h12" at 24.97,2417.233 h7.68 r90
  text "20js12" at 32.47,2416.763 h7.68 r90
  text "41,5js12" at 184.209,2352.53 h7.68
  text "50js12" at 164.27,2345.03 h7.68
  text "2,5js12" at 32.47,2340 h7.68 r90
  text "52,5h12" at 169.421,2337.53 h7.68
  text "В" at 221.814,2322.132 h15.36
  text "В" at 221.6,2288.025 h15.36
  text "1,5*" at 32.47,2284.719 h7.68 r90
  text "2" at 84.031,2212.955 h7.68
  text "1" at 104.451,2206.78 h7.68
  text "3" at 280.25,2204.03 h7.68
Top 3D Body:
  drawing of 191 lines, arcs and shapes, not listed
  text "ИУ4.11.03.03.21.83.13.002 СБ" at 66.602,2507.212 h7.17 r180
  text "ИУ4.11.03.03.21.83.13.002 СБ" at 660.602,2507.212 h7.17 r180
  text "ИУ4.11.03.03.21.83.13.002 СБ" at 1254.602,2507.212 h7.17 r180
  text "ИУ4.11.03.03.21.83.13.002 СБ" at 1848.602,2507.212 h7.17 r180
  text "Ra 25" at 515.8,2493.8 h10.75
  text "(" at 539.1,2493.8 h10.75
  text ")" at 550.1,2493.8 h10.75
  text "Перв. примен." at -10.818,2346.213 h5.38 r90
  text "ИУ4.11.03.03.21.83.13.002" at -4.818,2336.572 h5.38 r90
  text "Справ. №" at -10.818,2289.768 h5.38 r90
  text "Подп. и дата" at -10.818,2216.864 h5.38 r90
  text "Подп. и дата" at 583.182,2216.864 h5.38 r90
  text "Подп. и дата" at 1177.182,2216.864 h5.38 r90
  text "Подп. и дата" at 1771.182,2216.864 h5.38 r90
  text "Инв. № дубл." at -10.818,2187.342 h5.38 r90
  text "Инв. № дубл." at 583.182,2187.342 h5.38 r90
  text "Инв. № дубл." at 1177.182,2187.342 h5.38 r90
  text "Инв. № дубл." at 1771.182,2187.342 h5.38 r90
  text "Взам. инв. №" at -10.818,2162.295 h5.38 r90
  text "Взам. инв. №" at 583.182,2162.295 h5.38 r90
  text "Взам. инв. №" at 1177.182,2162.295 h5.38 r90
  text "Взам. инв. №" at 1771.182,2162.295 h5.38 r90
  text "ИУ4.11.03.03.21.83.13.002 СБ" at 454.393,2146.435 h10.75
  text "Лит." at 519.664,2138.018 h5.38
  text "Масса" at 534.339,2138.018 h5.38
  text "Масштаб" at 548.694,2138.018 h5.38
  text "Изм." at 380.898,2133.018 h5.38
  text "Лист" at 388.443,2133.018 h5.38
  text "№ докум." at 401.204,2133.018 h5.38
  text "Подп." at 423.878,2133.018 h5.38
  text "Дата" at 436.005,2133.018 h5.38
  text "Подп. и дата" at -10.818,2132.364 h5.38 r90
  text "Подп. и дата" at 583.182,2132.364 h5.38 r90
  text "Подп. и дата" at 1177.182,2132.364 h5.38 r90
  text "Подп. и дата" at 1771.182,2132.364 h5.38 r90
  text "Плата печатная многослойная" at 446.601,2131.291 h6.15
  text "Разраб." at 381.633,2127.871 h5.38
  text "Круглов В. С." at 398.78,2127.871 h4.64
  text "5:1" at 553.481,2127.339 h7.68
  text "Пров." at 381.633,2122.871 h5.38
  text "Леонидов В. С." at 398.78,2122.871 h4.27
  text "Т.контр." at 381.633,2117.871 h5.38
  text "Лист" at 517.542,2117.871 h5.38
  text "1" at 530.324,2117.871 h5.38
  text "Листов" at 538.585,2117.871 h5.38
  text "5" at 557.824,2117.871 h5.38
  text "Лист" at 1150.443,2111.6 h5.38
  text "Лист" at 1744.443,2111.6 h5.38
  text "Лист" at 2338.443,2111.6 h5.38
  text "Н.контр." at 381.633,2107.871 h5.38
  text "ИУ4.11.03.03.21.83.13.002 СБ" at 1043.393,2106.435 h10.75
  text "ИУ4.11.03.03.21.83.13.002 СБ" at 1637.393,2106.435 h10.75
  text "ИУ4.11.03.03.21.83.13.002 СБ" at 2231.393,2106.435 h10.75
  text "2" at 1153.916,2104.1 h5.38
  text "3" at 1747.916,2104.1 h5.38
  text "4" at 2342.14,2104.1 h5.38
  text "Изм." at 974.898,2103.1 h5.38
  text "Лист" at 982.443,2103.1 h5.38
  text "№ докум." at 994.754,2103.1 h5.38
  text "Подп." at 1017.878,2103.1 h5.38
  text "Дата" at 1030.005,2103.1 h5.38
  text "Изм." at 1568.898,2103.1 h5.38
  text "Лист" at 1576.443,2103.1 h5.38
  text "№ докум." at 1588.754,2103.1 h5.38
  text "Подп." at 1611.878,2103.1 h5.38
  text "Дата" at 1624.005,2103.1 h5.38
  text "Изм." at 2162.898,2103.1 h5.38
  text "Лист" at 2170.443,2103.1 h5.38
  text "№ докум." at 2182.754,2103.1 h5.38
  text "Подп." at 2205.878,2103.1 h5.38
  text "Дата" at 2218.005,2103.1 h5.38
  text "Утв." at 381.633,2102.871 h5.38
  text "Инв. № подл." at -10.818,2102.342 h5.38 r90
  text "Инв. № подл." at 583.182,2102.342 h5.38 r90
  text "Инв. № подл." at 1177.182,2102.342 h5.38 r90
  text "Инв. № подл." at 1771.182,2102.342 h5.38 r90
  text "МГТУ имени Н. Э. Баумана / Кафедра ИУ4 / Группа ИУ4-83Б" at 516.326,2101.948 h4.27
  text "Копировал" at 456.633,2097.871 h5.38
  text "Формат А2" at 535.253,2097.871 h5.38
  text "Копировал" at 1050.633,2097.871 h5.38
  text "Формат А2" at 1129.253,2097.871 h5.38
  text "Копировал" at 1644.633,2097.871 h5.38
  text "Формат А2" at 1723.253,2097.871 h5.38
  text "Копировал" at 2238.633,2097.871 h5.38
  text "Формат А2" at 2317.253,2097.871 h5.38
  text "ИУ4.11.03.03.21.83.13.002 СБ" at 66.602,2087.212 h7.17 r180
  text "Подп. и дата" at -10.818,1796.864 h5.38 r90
  text "Инв. № дубл." at -10.818,1767.342 h5.38 r90
  text "Взам. инв. №" at -10.818,1742.295 h5.38 r90
  text "Подп. и дата" at -10.818,1712.364 h5.38 r90
  text "Лист" at 556.443,1691.6 h5.38
  text "ИУ4.11.03.03.21.83.13.002 СБ" at 449.393,1686.435 h10.75
  text "5" at 559.824,1684.1 h5.38
  text "Изм." at 380.898,1683.1 h5.38
  text "Лист" at 388.443,1683.1 h5.38
  text "№ докум." at 400.754,1683.1 h5.38
  text "Подп." at 423.878,1683.1 h5.38
  text "Дата" at 436.005,1683.1 h5.38
  text "Инв. № подл." at -10.818,1682.342 h5.38 r90
  text "Копировал" at 456.633,1677.871 h5.38
  text "Формат А2" at 535.253,1677.871 h5.38
Bottom Courtyard:
  the board outline again, w0.254